# Altium PCB PCB_if-remote-control.pcbdoc
Units mil, origin at the board's own origin, x right, y up, seen from the top; angles counter-clockwise.
Board outline 10229.68 x 7944.68 mil, 2 copper layers (Top Layer, Bottom Layer); 88 components, 109 nets, 317 pads, 10 vias.
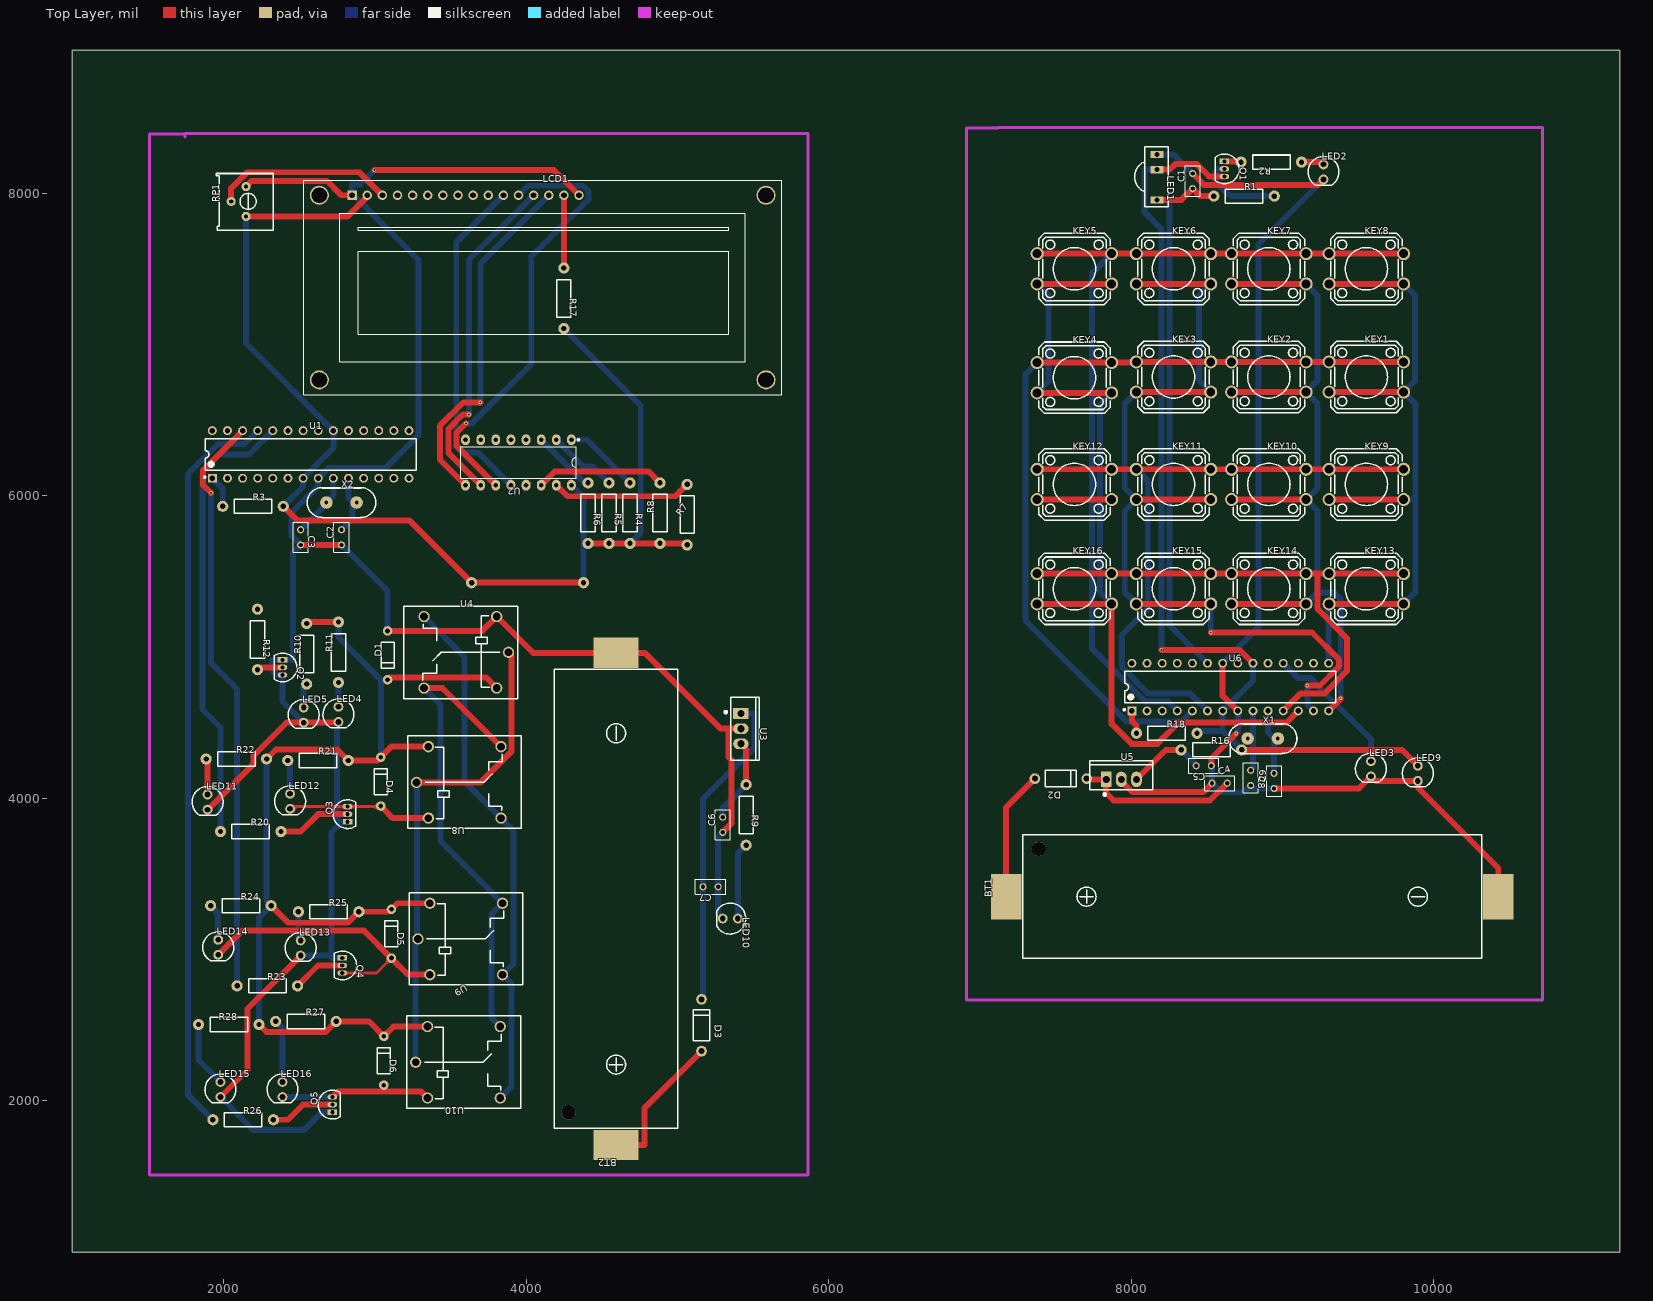
[diagram p0: Top Layer view]
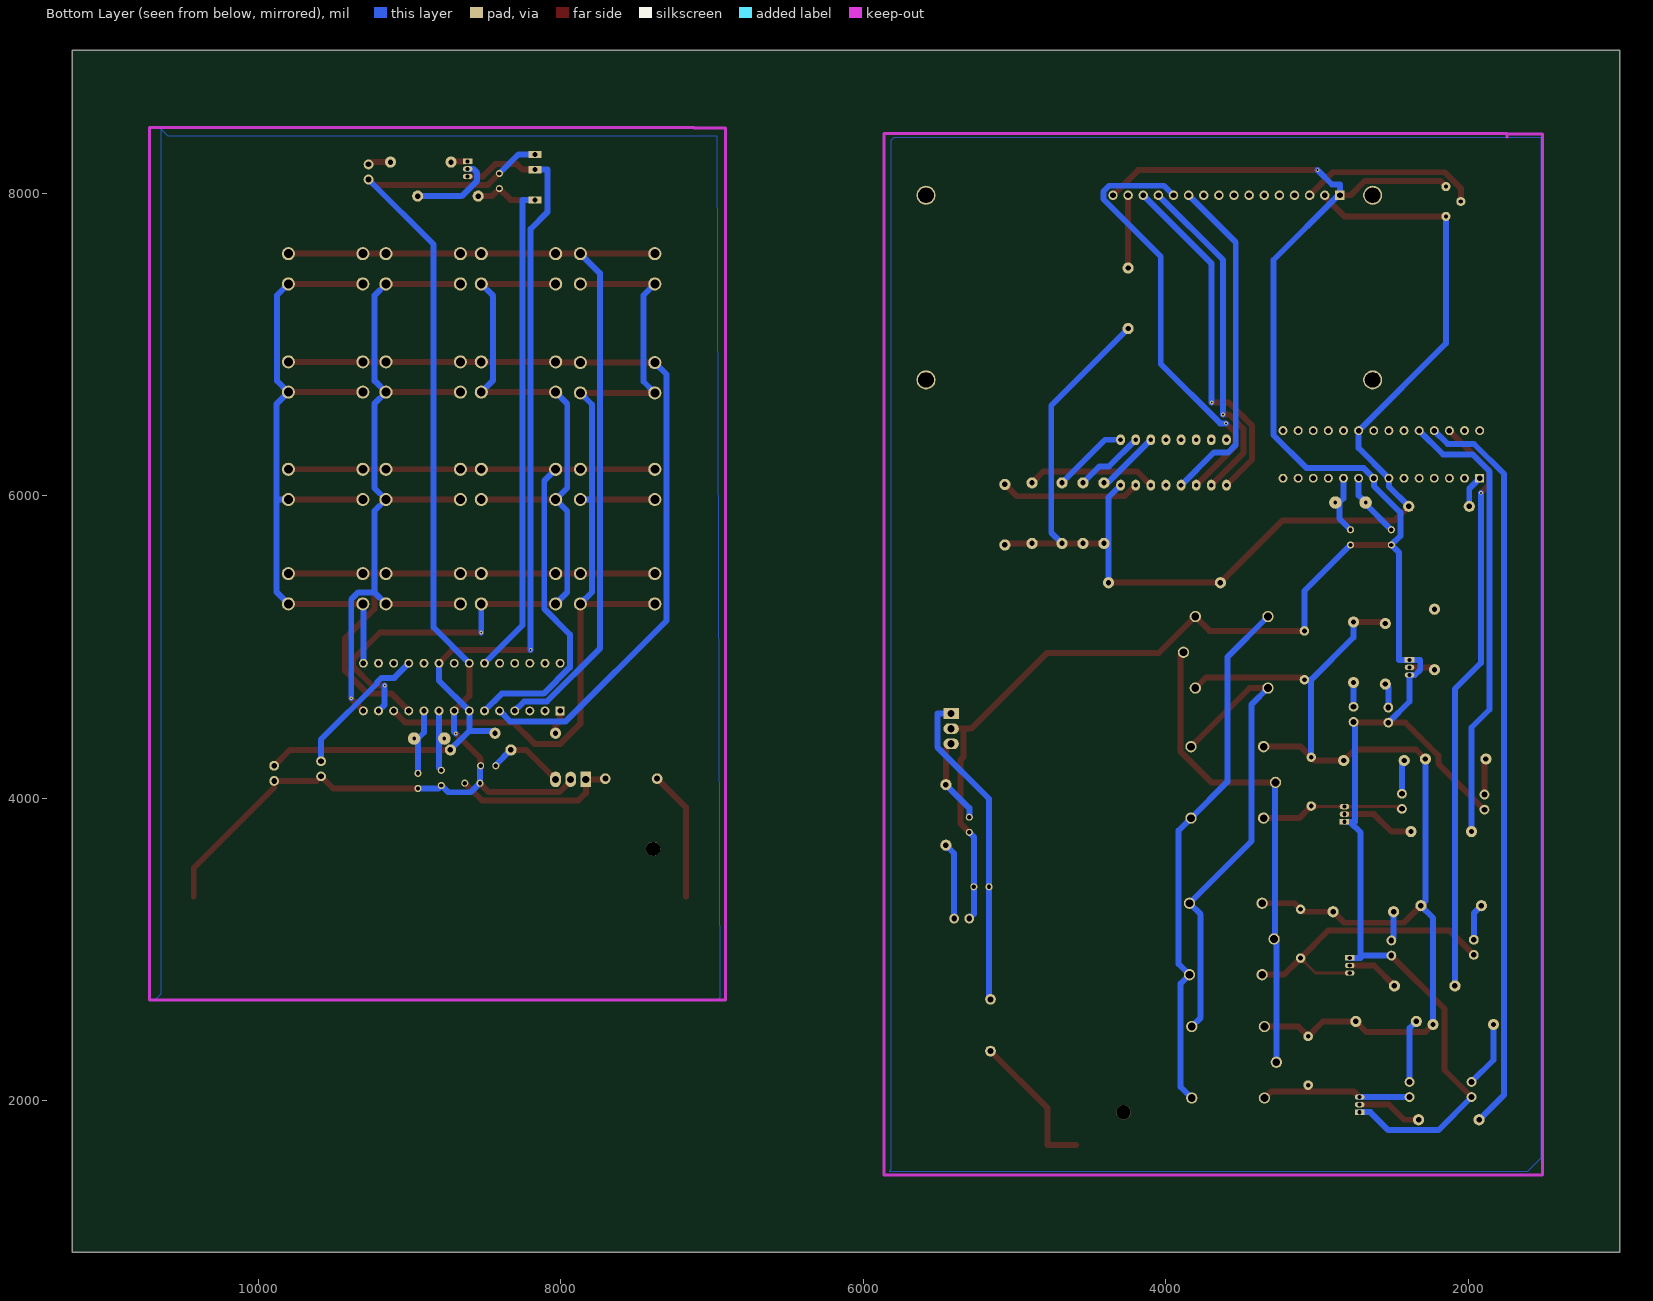
[diagram p1: Bottom Layer view, seen from below]

## Layer stack, top to bottom
Top Solder: solder mask 0.4, Solder Resist, Dk 3.5
Top Layer: signal copper 1.4
Dielectric1: dielectric 12.6, FR-4, Dk 4.8
Bottom Layer: signal copper 1.4
Bottom Solder: solder mask 0.4, Solder Resist, Dk 3.5

## Board outline
11229.68,1000 1000,1000 1000,8944.68 11229.68,8944.68

## Design rules (kind name [scope] priority, off if disabled: settings)
Clearance [All] p1: gap=10 ignorepadtopadclearanceinfootprint=FALSE except(0: Arc-Hole Track-Hole SMDPad-Hole THPad-Hole Via-Hole Fill-Hole Poly-Hole Region-Hole Text-Hole)
PolygonConnect [All] p1: connectstyle=Relief reliefconductorwidth=10 reliefentries=4 polygonreliefangle="90 Angle" airgapwidth=10
RoutingVias [All] p1: holewidth=28 width=50 viastyle="Through Hole" minholewidth=28 minwidth=50 maxholewidth=28 maxwidth=50
SolderMaskExpansion [All] p1: expansion=4 istentingtop=FALSE
Width [All] p1: maxlimit=10 minlimit=10 preferedwidth=10
30 further rules are at their usual default settings.

## Components (designator, comment, footprint, x,y, rotation, side; value= is the part's Value field where it differs from the comment)
BT1 "BH-18650-B1BA002" BATTERY-SMD_18650-1S-L77.1-W20.7-1 8799.84,3349.84 r90 top
BT2 "BH-18650-B1BA002" BATTERY-SMD_18650-1S-L77.1-W20.7-1 4594.84,3334.84 r180 top
C1 "1u" RAD-0.1 8406.21,8080.21 r90 top
C2 "1u" RAD-0.1 2779.84,5724.84 r90 top
C3 "1u" RAD-0.1 2509.84,5724.84 r270 top
C4 "1u" RAD-0.1 8584.84,4099.84 r0 top
C5 "1u" RAD-0.1 8479.84,4214.84 r180 top
C6 "1u" RAD-0.1 5299.84,3824.84 r90 top
C7 "1u" RAD-0.1 5219.84,3414.84 r180 top
C8 "1u" RAD-0.1 8789.84,4134.84 r270 top
C9 "1u" RAD-0.1 8944.84,4114.84 r90 top
D1 "1N4148" DO-35_BD2.0-L4.2-P8.20-D0.5-RD 3084.84,4944.84 r90 top
D2 "1N4007" DO-41_BD2.4-L4.7-P8.70-D0.9-RD 7534.84,4129.84 r180 top
D3 "1N4007" DO-41_BD2.4-L4.7-P8.70-D0.9-RD 5159.84,2499.84 r270 top
D4 "1N4148" DO-35_BD2.0-L4.2-P8.20-D0.5-RD 3039.84,4109.84 r270 top
D5 "1N4148" DO-35_BD2.0-L4.2-P8.20-D0.5-RD 3109.84,3104.84 r270 top
D6 "1N4148" DO-35_BD2.0-L4.2-P8.20-D0.5-RD 3059.84,2264.84 r270 top
KEY1 "K4-12×12_TH" KEY-TH_4P-L12.0-W12.0-P5.00-LS12.5 9554.84,6784.84 r0 top
KEY2 "K4-12×12_TH" KEY-TH_4P-L12.0-W12.0-P5.00-LS12.5 8909.84,6784.84 r0 top
KEY3 "K4-12×12_TH" KEY-TH_4P-L12.0-W12.0-P5.00-LS12.5 8279.84,6784.84 r0 top
KEY4 "K4-12×12_TH" KEY-TH_4P-L12.0-W12.0-P5.00-LS12.5 7624.84,6779.84 r0 top
KEY5 "K4-12×12_TH" KEY-TH_4P-L12.0-W12.0-P5.00-LS12.5 7624.84,7499.84 r0 top
KEY6 "K4-12×12_TH" KEY-TH_4P-L12.0-W12.0-P5.00-LS12.5 8279.85,7499.84 r0 top
KEY7 "K4-12×12_TH" KEY-TH_4P-L12.0-W12.0-P5.00-LS12.5 8909.84,7499.84 r0 top
KEY8 "K4-12×12_TH" KEY-TH_4P-L12.0-W12.0-P5.00-LS12.5 9554.84,7499.84 r0 top
KEY9 "K4-12×12_TH" KEY-TH_4P-L12.0-W12.0-P5.00-LS12.5 9554.84,6074.84 r0 top
KEY10 "K4-12×12_TH" KEY-TH_4P-L12.0-W12.0-P5.00-LS12.5 8909.84,6074.84 r0 top
KEY11 "K4-12×12_TH" KEY-TH_4P-L12.0-W12.0-P5.00-LS12.5 8279.85,6074.84 r0 top
KEY12 "K4-12×12_TH" KEY-TH_4P-L12.0-W12.0-P5.00-LS12.5 7624.84,6074.84 r0 top
KEY13 "K4-12×12_TH" KEY-TH_4P-L12.0-W12.0-P5.00-LS12.5 9554.84,5384.84 r0 top
KEY14 "K4-12×12_TH" KEY-TH_4P-L12.0-W12.0-P5.00-LS12.5 8909.84,5384.84 r0 top
KEY15 "K4-12×12_TH" KEY-TH_4P-L12.0-W12.0-P5.00-LS12.5 8279.85,5384.84 r0 top
KEY16 "K4-12×12_TH" KEY-TH_4P-L12.0-W12.0-P5.00-LS12.5 7624.84,5384.84 r0 top
LCD1 "LCD1602" LCD1602 4109.84,7375.74 r0 top
LED1 "TSOP1736" SENSOR-TH_TSOP17XX 8171.21,8105.21 r270 top
LED2 "LED-TH-5mm_G" LED-TH_BD5.0_GREEN 9271.21,8140.21 r0 top
LED3 "ir26-21c" LED-TH_BD5.0_GREEN 9584.84,4194.84 r0 top
LED4 "LED-TH-5mm_G" LED-TH_BD5.0_GREEN 2759.84,4554.84 r0 top
LED5 "LED-TH-5mm_G" LED-TH_BD5.0_GREEN 2529.84,4549.84 r0 top
LED9 "LED-TH-5mm_G" LED-TH_BD5.0_GREEN 9894.84,4164.84 r0 top
LED10 "LED-TH-5mm_G" LED-TH_BD5.0_GREEN 5349.84,3204.84 r270 top
LED11 "LED-TH-5mm_G" LED-TH_BD5.0_GREEN 1894.84,3974.84 r0 top
LED12 "LED-TH-5mm_G" LED-TH_BD5.0_GREEN 2439.84,3979.84 r0 top
LED13 "LED-TH-5mm_G" LED-TH_BD5.0_GREEN 2509.84,3009.84 r0 top
LED14 "LED-TH-5mm_G" LED-TH_BD5.0_GREEN 1964.84,3014.84 r0 top
LED15 "LED-TH-5mm_G" LED-TH_BD5.0_GREEN 1979.84,2074.84 r0 top
LED16 "LED-TH-5mm_G" LED-TH_BD5.0_GREEN 2389.84,2074.84 r0 top
Q1 "2N3906(TO-92)" TO-92-3_L4.9-W3.7-P1.27-L 8616.21,8160.21 r270 top
Q2 "2N3904(TO-92)" ? 2389.84,4864.84 r270 top
Q3 "2N3904(TO-92)" ? 2819.84,3894.84 r90 top
Q4 "2N3904(TO-92)" ? 2784.84,2894.84 r270 top
Q5 "2N3904(TO-92)" ? 2719.84,1974.84 r90 top
R1 "1k" R_AXIAL-0.4 8746.21,7980.21 r0 top
R2 "1k" R_AXIAL-0.4 8926.21,8205.21 r180 top
R3 "10k" R_AXIAL-0.4 2194.84,5929.84 r0 top
R4 "10k" R_AXIAL-0.4 4687.34,5884.84 r270 top
R5 "10k" R_AXIAL-0.4 4548.59,5884.84 r270 top
R6 "10k" R_AXIAL-0.4 4409.84,5884.84 r270 top
R7 "10k" R_AXIAL-0.4 5064.84,5874.84 r90 top
R8 "10k" R_AXIAL-0.4 4884.84,5884.84 r90 top
R9 "1k" R_AXIAL-0.4 5454.84,3889.84 r270 top
R10 "1k" R_AXIAL-0.4 2549.84,4954.84 r90 top
R11 "1k" R_AXIAL-0.4 2759.84,4964.84 r90 top
R12 "1k" R_AXIAL-0.4 2224.84,5049.84 r270 top
R16 "1k" R_AXIAL-0.4 8529.84,4319.84 r0 top
R17 "470" R_AXIAL-0.4 4249.84,7304.84 r270 top
R18 "10k" R_AXIAL-0.4 8234.84,4429.84 r0 top
R20 "1k" R_AXIAL-0.4 2179.84,3779.84 r0 top
R21 "1k" R_AXIAL-0.4 2624.84,4249.84 r0 top
R22 "1k" R_AXIAL-0.4 2084.84,4259.84 r0 top
R23 "1k" R_AXIAL-0.4 2289.84,2759.84 r0 top
R24 "1k" R_AXIAL-0.4 2114.84,3289.84 r0 top
R25 "1k" R_AXIAL-0.4 2694.84,3249.84 r0 top
R26 "1k" R_AXIAL-0.4 2129.84,1874.84 r0 top
R27 "1k" R_AXIAL-0.4 2544.84,2524.84 r0 top
R28 "1k" R_AXIAL-0.4 2034.84,2504.84 r0 top
RP1 "R_3386P_EU" RES-ADJ-TH_3386P 2099.84,7944.84 r90 top
U1 "ATMEGA328P-PU" DIP-28_L34.6-W7.3-P2.54-LS10.2-BL 2576.04,6272.84 r0 top
U2 "PCF8574P" DIP-16_L19.3-W6.4-P2.54-LS7.6-BL 3949.84,6219.84 r180 top
U3 "7805(TO-220)" TO-220-3_L10.0-W4.5-P2.54-L 5419.84,4459.84 r270 top
U4 "RELAY-SPST" RELAY-TH_RELAY-SPST 3604.84,4964.84 r0 top
U5 "7805(TO-220)" TO-220-3_L10.0-W4.5-P2.54-L 7934.84,4124.84 r0 top
U6 "ATMEGA328P-PU" DIP-28_L34.6-W7.3-P2.54-LS10.2-BL 8654.84,4734.84 r0 top
U8 "RELAY-SPST" RELAY-TH_RELAY-SPST 3554.84,4104.84 r180 top
U9 "RELAY-SPST" RELAY-TH_RELAY-SPST 3564.84,3069.84 r180 top
U10 "RELAY-SPST" RELAY-TH_RELAY-SPST 3549.84,2254.84 r180 top
X1 "4MHz" CRISTAL_4MHZ 8869.84,4394.84 r0 top
X2 "4MHz" CRISTAL_4MHZ 2779.84,5954.84 r0 top

## Footprints (in the part's own frame and the unit in brackets; to place one, negate y for a bottom-side part, rotate by r counter-clockwise, add the part's x,y. Pads: shape width x height; smd on the part's side, far side on the other; paste and mask are expansions set on the pad)
BATTERY-SMD_18650-1S-L77.1-W20.7-1 [mm]
  rect 7.62x5.08 smd paste+0 mask+0.051: 1(0,-41.313) 2(0,41.313)
  round 2.4 hole 2.4 unplated paste+0: ""(8,35.84)
  silkscreen extent -10.35,-38.54 10.35,38.54
CRISTAL_4MHZ [mm]
  round 2.1 hole 0.6 paste+0 mask+0.051: 1(-2.54,0) 2(2.54,0)
  silkscreen extent -5.75,-2.56 5.75,2.56
DIP-16_L19.3-W6.4-P2.54-LS7.6-BL [mm]
  oval 1.46x1.825 hole 0.8 paste+0 mask+0.051: 1(-8.89,-3.81) 2(-6.35,-3.81) 3(-3.81,-3.81) 4(-1.27,-3.81) 5(1.27,-3.81) 6(3.81,-3.81) 7(6.35,-3.81) 8(8.89,-3.81) 9(8.89,3.81) 10(6.35,3.81) 11(3.81,3.81) 12(1.27,3.81) 13(-1.27,3.81) 14(-3.81,3.81) 15(-6.35,3.81) 16(-8.89,3.81)
  silkscreen extent -10.22,-3.96 9.73,2.67
DIP-28_L34.6-W7.3-P2.54-LS10.2-BL [mm]
  rect 1.5x1.5 hole 0.9 paste+0 mask+0.051: 1(-16.51,-4)
  round 1.5 hole 0.9 paste+0 mask+0.051: 2(-13.97,-4) 3(-11.43,-4) 4(-8.89,-4) 5(-6.35,-4) 6(-3.81,-4) 7(-1.27,-4) 8(1.27,-4) 9(3.81,-4) 10(6.35,-4) 11(8.89,-4) 12(11.43,-4) 13(13.97,-4) 14(16.51,-4) 15(16.51,4) 16(13.97,4) 17(11.43,4) 18(8.89,4) 19(6.35,4) 20(3.81,4) 21(1.27,4) 22(-1.27,4) 23(-3.81,4) 24(-6.35,4) 25(-8.89,4) 26(-11.43,4) 27(-13.97,4) 28(-16.51,4)
  silkscreen extent -17.94,-3.95 17.7,2.65
DO-35_BD2.0-L4.2-P8.20-D0.5-RD [mm]
  round 1.6 hole 0.8 paste+0 mask+0.051: 1(-4.1,0) 2(4.1,0)
  silkscreen extent -2.2,-1.1 2.2,1.1
DO-41_BD2.4-L4.7-P8.70-D0.9-RD [mm]
  round 1.8 hole 1 paste+0 mask+0.051: 1(-4.35,0) 2(4.35,0)
  silkscreen extent -2.6,-1.4 2.6,1.4
KEY-TH_4P-L12.0-W12.0-P5.00-LS12.5 [mm]
  round 2.2 hole 1.5 paste+0 mask+0.051: 1(-6.251,2.54) 2(6.251,2.54) 3(-6.251,-2.54) 4(6.251,-2.54)
  silkscreen extent -5.99,-6 5.99,6
LCD1602 [mm]
  round 3.2 hole 2.5 slot 2.625 at 0 deg paste+0 mask+0.051: 0(-37.5,-15.5) 0(-37.5,15.5) 0(37.5,-15.5) 0(37.5,15.5)
  rect 1.6x1.6 hole 1 paste+0 mask+0.051: 1(-32,15.5)
  round 1.6 hole 1 paste+0 mask+0.051: 2(-29.46,15.5) 3(-26.92,15.5) 4(-24.38,15.5) 5(-21.84,15.5) 6(-19.3,15.5) 7(-16.76,15.5) 8(-14.22,15.5) 9(-11.68,15.5) 10(-9.14,15.5) 11(-6.6,15.5) 12(-4.06,15.5) 13(-1.52,15.5) 14(1.02,15.5) 15(3.56,15.5) 16(6.1,15.5)
  silkscreen extent -40.13,-18.03 40.13,18.03
LED-TH_BD5.0_GREEN [mil]
  round 65 hole 38 paste+0 mask+2: 1(0,50) 2(0,-50)
  silkscreen extent -102,-88 102,102
R_AXIAL-0.4 [mil]
  round 74 hole 35.4 paste+0 mask+2: 1(-200,0) 2(200,0)
  silkscreen extent -124,-47 124,47
RAD-0.1 [mil]
  round 47 hole 28 paste+0 mask+2: 1(-50,0) 2(50,0)
  silkscreen extent -100,-50 100,50
RELAY-TH_RELAY-SPST [mm]
  round 1.9 hole 1.3 paste+0 mask+0.05: 1(-7.1,6) 2(5.1,6) 3(7.1,0) 4(5.1,-6) 5(-7.1,-6)
  silkscreen extent -10.5,-7.8 8.6,7.7
RES-ADJ-TH_3386P [mil]
  round 60 hole 27.56 paste+0 mask+2: 1(98.43,-49.21) 2(0.01,49.22) 3(-98.43,-49.21)
  silkscreen extent -190,-228 185,147
SENSOR-TH_TSOP17XX [mil]
  rect 47.7x85.9 hole 32 paste+0 mask+2: GND(-150,0) OUT(150,0) V+(-50,0)
  silkscreen extent -200,-149 194,75
TO-92-3_L4.9-W3.7-P1.27-L [mm]
  rect 0.9x1.6 hole 0.7 paste+0 mask+0.051: 1(-1.27,0)
  oval 0.9x1.6 hole 0.7 paste+0 mask+0.051: 2(0,0) 3(1.27,0)
  silkscreen extent -2.48,-1.5 2.48,2.48
TO-220-3_L10.0-W4.5-P2.54-L [mm]
  rect 1.8x2.6 hole 1.2 paste+0 mask+0.051: 1(-2.54,0.005)
  oval 1.8x2.6 hole 1.2 paste+0 mask+0.051: 2(0,0.005) 3(2.54,-0.005)
  silkscreen extent -5.3,-2.73 5.3,3.09
? [mm]
  rect 0.9x1.6 hole 0.7 paste+0 mask+0.051: 1(-1.27,0)
  oval 0.9x1.6 hole 0.7 paste+0 mask+0.051: 2(0,0) 3(1.27,0)
  silkscreen extent -2.41,-1.35 2.41,2.41

## Free pads (board coordinates)
  round 74 hole 35.4 paste+0 mask+2: 1(4379.84,5424.84) 2(3639.84,5424.84)

## Via types
v1: diameter 24.02, hole 12.01, Top Layer to Bottom Layer, 10 vias

## Nets (pads, with @x,y where several pads share a name; then routed paths per layer and width w, separated by ;. In a path a pad name is that pad's centre, name@x,y a point inside that pad or via, vN(x,y) a via of type N, cw(c..) or ccw(c..) an arc to the next point about the centre after c; other vN are vias at no path point)
5V: LED10.1 R9.2 | length 507.8
  Bottom Layer w39.37: LED10.1 5399.84,3634.84 R9.2
+5V: LCD1.2 pad.1 pad.2 R3.2 R4.2 R5.2 R6.2 R7.1 R8.1 R17.2 RP1.3 U1.7 U1.20 U2.16 | length 8378.6
  Top Layer w39.37: RP1.3 2820.32,7846.41 2950,7976.09 LCD1.2 ; R3.2 2487.9,5836.78 3227.9,5836.78 pad.2 pad.1 ; R6.2 R5.2 R4.2 R8.1 5054.84,5684.84 R7.1
  Bottom Layer w39.37: RP1.3 2149.05,7007.31 U1.20 2726.04,6315.36 U1.7 2526.04,6061.04 R3.2 ; R17.2 4758.06,6596.62 4758.06,5755.56 R4.2 ; U2.16 4379.84,5989.84 R6.2@4379.84,5684.84 ; pad.1 R6.2@4379.84,5684.84 ; R6.2 R6.2@4379.84,5684.84
++5V: LED1.V+ LED9.1 Q1.3 R16.2 R18.2 U6.7 U6.20 | length 6530.1
  Top Layer w39.37: LED1.V+ 8253.54,8155.21 8290.17,8191.84 8433.47,8191.84 8515.1,8110.21 Q1.3 ; v1(8199.71,4980.93) 8716.23,4980.93 U6.20 ; R16.2 9789.84,4319.84 LED9.1
  Bottom Layer w39.37: LED1.V+ 8088.89,8155.21 8088.89,7874.08 8199.71,7763.26 v1(8199.71,4980.93) ; R18.2 8449.84,4444.84 8604.84,4444.84 ; R16.2 8604.84,4444.84 ; U6.20 8804.84,4777.36 U6.7 8604.84,4444.84
COM: U4.3 U8.3 U9.3 U10.3 | length 3239
  Top Layer w39.37: U8.3 3699.51,4104.84 3904.44,4309.77 3904.44,4944.77 U4.3
  Bottom Layer w39.37: U10.3 3270.31,3062.34 U9.3@3277.81,3069.84 ; U8.3 3277.81,4102.34 U9.3@3277.81,3069.84 ; U9.3 U9.3@3277.81,3069.84
D2_2: BT1.2 D2.2 | length 858.8
  Top Layer w39.37: BT1.2 7173.34,3939.6 D2.2
D3_2: BT2.2 D3.2 | length 965.2
  Top Layer w39.37: BT2.2 4784.24,1708.34 4784.24,1952.98 D3.2
DB4: LCD1.11 U2.12 | length 2250.7
  Bottom Layer w39.37: LCD1.11 3538.42,7674.39 3538.42,6336.01 3588.48,6285.95 3683.73,6285.95 U2.12
DB5: LCD1.12 U2.11 | length 2939.3
  Top Layer w39.37: v1(3602.74,6477.86) 3539.53,6414.65 3539.53,6330.15 U2.11
  Bottom Layer w39.37: v1(3602.74,6477.86) 3641.89,6477.86 4034.3,6870.27 4034.3,7581.08 4413.06,7959.84 4413.06,8012.1 4376.13,8049.03 4013.06,8049.03 LCD1.12
DB6: LCD1.13 U2.10 | length 2260.4
  Top Layer w39.37: v1(3623.12,6536.37) 3582.51,6536.37 3488.06,6441.92 3488.06,6281.62 U2.10
  Bottom Layer w39.37: v1(3623.12,6536.37) 3623.12,7559.09 LCD1.13
DB7: LCD1.14 U2.9 | length 2350.1
  Top Layer w39.37: U2.9 3430.27,6239.41 3430.27,6461.33 3585.47,6616.53 v1(3697.55,6616.53)
  Bottom Layer w39.37: v1(3697.55,6616.53) 3697.55,7533.52 LCD1.14
GND: BT2.1 C2.1 C3.2 C6.1 C7.1 D1.2 LCD1.1 LCD1.16 LED4.2 LED5.2 LED10.2 LED11.2 LED13.2 LED15.2 Q2.1 Q2.3 Q3.1 Q4.1 Q5.1 RP1.1 U1.8 U3.2 U4.2 | length 17061.1
  Top Layer w39.37: LED11.2 2199.05,4229.05 2199.05,4282.45 2416.44,4499.84 LED5.2 2754.84,4499.84 LED4.2 ; LED15.2 2158.41,2203.41 2158.41,2608.41 LED13.2 ; RP1.1 2186.7,8080.91 2684.16,8080.91 2779.1,7985.97 LCD1.1 ; C3.2 C2.1 ; v1(2997.47,8152.29) 4183.68,8152.29 LCD1.16 ; D1.2 3710.83,5106.26 U4.2 4045.35,4961.34 BT2.1 4688.73,4961.34 4784.24,4961.34 5285.73,4459.85 5336.83,4459.85 ; C6.1 5358.96,3833.96 5358.96,4252.3 5336.83,4274.43 5336.83,4459.85 ; U3.2@5420.04,4459.85 5336.83,4459.85
  Bottom Layer w39.37: LED15.2 2198.66,1806.02 2530.12,1806.02 2648.94,1924.84 Q5.1 ; LED13.2 2713.94,2959.84 ; LED5.2 2389.84,4639.84 Q2.3 2353.78,4814.84 2318.94,4849.68 2318.94,4914.84 Q2.1 2460.74,4914.84 2460.74,5625.74 C3.2 2449.81,5734.87 2449.81,5887.83 2626.04,6064.06 U1.8 2692.45,6181.77 3069.84,6181.77 3288.75,6400.68 3288.75,7558.04 2850,7996.79 LCD1.1@2850,8009.5 ; LED4.2 2748.94,4493.94 2748.94,3844.84 2784.39,3844.84 ; C2.1 3084.84,5369.84 D1.2 ; Q4.1 2713.94,2944.84 2713.94,2959.84 ; Q3.1 2784.39,3844.84 ; LCD1.1 LCD1.1@2850,8009.5 ; v1(2997.47,8152.29) 2902.05,8056.87 2850,8056.87 LCD1.1@2850,8009.5 ; LED10.2 5269.84,3234.84 C7.1 5269.84,3744.84 C6.1 ; 2713.94,2959.84 2713.94,3774.39 2784.39,3844.84
GND1: BT1.1 C1.2 C4.1 C5.1 C8.2 C9.1 LED1.GND LED2.2 LED3.2 LED9.2 U5.2 U6.8 U6.22 | length 8688.6
  Top Layer w39.37: U5.2 7934.84,4113.96 8008.54,4040.26 8475.26,4040.26 C4.1 ; C1.2 8481.1,8055.32 9236.32,8055.32 LED2.2 ; C5.1 8529.84,4263.23 v1(8694.39,4427.78) ; U6.22 8604.84,4677.36 U6.8 ; C9.1 9504.84,4064.84 LED3.2 9614.84,4114.84 LED9.2 9894.84,4070.74 10426.34,3539.24 BT1.1
  Bottom Layer w39.37: LED1.GND 8281.21,8255.21 C1.2 ; C5.1 8534.84,4209.84 C4.1 8595.1,4039.58 8744.58,4039.58 C8.2 8809.84,4064.84 C9.1 ; U6.22 8841.12,5128.6 8841.12,7660.12 LED2.2 ; v1(8694.39,4427.78) 8704.84,4438.23 U6.8
INPUT: R12.1
LCD1_3: LCD1.3 RP1.2 | length 1193.8
  Top Layer w39.37: RP1.2 2050.63,8032.37 2156.51,8138.25 2897.72,8138.25 LCD1.3
LCD1_7: LCD1.7
LCD1_8: LCD1.8
LCD1_9: LCD1.9
LCD1_10: LCD1.10
LED11_1: LED11.1 R22.1 | length 239.1
  Top Layer w39.37: R22.1 1894.84,4249.84 LED11.1
LED12_1: LED12.1 R21.1 | length 226.2
  Bottom Layer w39.37: R21.1 2439.84,4234.84 LED12.1
LED13_1: LED13.1 R25.1 | length 196.2
  Bottom Layer w39.37: R25.1 2494.84,3074.84 LED13.1
LED14_1: LED14.1 R24.1 | length 245.7
  Bottom Layer w39.37: R24.1 1964.84,3239.84 LED14.1
LED15_1: LED15.1 R28.1 | length 440.1
  Bottom Layer w39.37: R28.1 1834.84,2269.84 LED15.1
LED16_1: LED16.1 R27.1 | length 418.6
  Bottom Layer w39.37: R27.1 2389.84,2479.84 LED16.1
NC: U4.5 U8.5 U9.5 U10.5 | length 3177
  Top Layer w39.37: U4.5 3446.81,4728.62 U8.5
  Bottom Layer w39.37: U4.5 3433.09,4620.84 3433.09,3717.34 U9.5 3770.63,3232.32 3770.63,2549.8 U10.5
NO: U4.1 U8.1 U9.1 U10.1 | length 3511.6
  Bottom Layer w39.37: U4.1 3594.21,4932.16 3594.21,4108.78 U8.1 3916.6,3786.39 3916.6,2905.85 U9.1 3902.43,2775.56 3902.43,2091.68 U10.1
P0: LCD1.6
P1: LCD1.5
P2: LCD1.4
PB0: KEY2.3 KEY2.4 KEY7.3 KEY7.4 KEY10.3 KEY10.4 KEY14.3 KEY14.4 U6.14 | length 5215
  Top Layer w39.37: KEY14.3 KEY14.4 ; KEY10.3 KEY10.4 ; KEY2.3 KEY2.4 ; KEY7.3 KEY7.4 ; U6.14 9385.22,4657.74 v1(9385.22,4661.12)
  Bottom Layer w39.37: KEY14.4 9232.34,5361.24 ; KEY7.4 9230.82,7324.96 9230.82,6759.72 KEY2.4 9232.34,6608.44 9232.34,6051.24 KEY10.4 9232.34,5898.44 9232.34,5361.24 ; v1(9385.22,4661.12) 9385.22,5314.39 9338.37,5361.24 9232.34,5361.24
PB1: KEY1.3 KEY1.4 KEY8.3 KEY8.4 KEY9.3 KEY9.4 KEY13.3 KEY13.4 U6.15 | length 4681.4
  Top Layer w39.37: KEY13.3 KEY13.4 ; KEY9.3 KEY9.4 ; KEY1.3 KEY1.4 ; KEY8.3 KEY8.4
  Bottom Layer w39.37: U6.15 9304.84,5280.94 KEY13.3 ; KEY13.4 9878.29,5362.19 9878.29,5974.84 ; KEY9.4 9878.29,5974.84 ; KEY8.4 9875.82,7324.96 9875.82,6759.72 KEY1.4 9878.29,6607.49 9878.29,5974.84
PB4: LED3.1 U6.18 | length 937.3
  Bottom Layer w39.37: U6.18 9100.77,4796.39 9185.42,4796.39 9215.43,4766.38 9215.43,4758.42 9584.84,4389.01 LED3.1
PC0: C1.1 LED1.OUT R1.1 U6.23 | length 3676.1
  Top Layer w39.37: LED1.OUT 8331.21,7955.21 C1.1 8456.21,7980.21 R1.1
  Bottom Layer w39.37: LED1.OUT 8253.54,7955.21 8253.54,5143.62 U6.23
PC1: R20.1 U1.24 | length 3006.5
  Bottom Layer w39.37: R20.1 1979.84,4467.88 1861.14,4586.58 1861.14,6160.51 1973.47,6272.84 2168.56,6272.84 U1.24
PC2: R26.1 U1.25 | length 4917
  Bottom Layer w39.37: R26.1 1764.68,2040 1764.68,6143.14 1963.65,6342.11 2137.83,6342.11 U1.25
PC3: R23.1 U1.26 | length 3871.8
  Top Layer w39.37: v1(1917.3,6018.58) 1864.94,6070.94 1864.94,6169.22 U1.26
  Bottom Layer w39.37: v1(1917.3,6018.58) 1917.3,4895.07 2089.84,4722.53 R23.1
PC4: R7.2 U2.15 | length 928
  Top Layer w39.37: U2.15 4273.41,5996.27 4986.27,5996.27 R7.2
PC5: R8.2 U2.14 | length 853.1
  Top Layer w39.37: U2.14 4189.53,6159.53 4810.15,6159.53 R8.2
PD2: KEY5.1 KEY5.2 KEY6.1 KEY6.2 KEY7.1 KEY7.2 KEY8.1 KEY8.2 U6.4 | length 5819.4
  Top Layer w39.37: KEY5.1 KEY5.2 KEY6.1 KEY6.2 KEY7.1 KEY7.2 KEY8.1 KEY8.2
  Bottom Layer w39.37: KEY5.2 7742.14,7471.04 7742.14,4989.42 8092.07,4639.49 8242.71,4639.49 U6.4
PD3: KEY1.1 KEY1.2 KEY2.1 KEY2.2 KEY3.1 KEY3.2 KEY4.1 KEY4.2 U6.5 | length 5569.7
  Top Layer w39.37: KEY4.1 KEY4.2 8028.74,6879.84 KEY3.1 KEY3.2 KEY2.1 KEY2.2 KEY1.1 KEY1.2
  Bottom Layer w39.37: KEY4.1 7301.42,6802.52 7301.42,5174.41 7967.56,4508.27 8335.75,4508.27 U6.5
PD4: KEY9.1 KEY9.2 KEY10.1 KEY10.2 KEY11.1 KEY11.2 KEY12.1 KEY12.2 U6.6 | length 4517.9
  Top Layer w39.37: KEY12.1 KEY12.2 KEY11.1 KEY11.2 KEY10.1 KEY10.2 KEY9.1 KEY9.2
  Bottom Layer w39.37: KEY11.1 8109.64,6098.94 8109.64,5252.54 7939.77,5082.67 7939.77,4865.28 8113.27,4691.78 8390.42,4691.78 U6.6
PD5: KEY13.1 KEY13.2 KEY14.1 KEY14.2 KEY15.1 KEY15.2 KEY16.1 KEY16.2 U6.11 | length 3676.5
  Top Layer w39.37: KEY16.1 KEY16.2 KEY15.1 KEY15.2 KEY14.1 KEY14.2 9232.34,5484.84 ; U6.11 9121.37,4693.89 9278.59,4693.89 9426.07,4841.37 9426.07,5057.8 9232.34,5251.53 9232.34,5484.84 ; KEY13.2 KEY13.1 9232.34,5484.84
PD6: KEY4.3 KEY4.4 KEY5.3 KEY5.4 KEY12.3 KEY12.4 KEY16.3 KEY16.4 U6.12 | length 6459.2
  Top Layer w39.37: KEY16.3 KEY16.4 7870.94,4491.76 8003.18,4359.52 8173.41,4359.52 8316.01,4502.12 9029.6,4502.12 U6.12 ; KEY12.3 KEY12.4 ; KEY4.3 KEY4.4 ; KEY5.3 KEY5.4
  Bottom Layer w39.37: KEY4.3 7453.62,6754.72 7453.62,7324.96 KEY5.3 ; KEY16.4 7793.6,5362.18 7793.6,5974.84 ; KEY12.4 7793.6,5974.84 ; KEY4.4 7793.6,6602.5 7793.6,5974.84
PD7: KEY3.3 KEY3.4 KEY6.3 KEY6.4 KEY11.3 KEY11.4 KEY15.3 KEY15.4 U6.13 | length 5878
  Top Layer w39.37: KEY15.3 KEY15.4 ; KEY11.3 KEY11.4 ; KEY3.3 KEY3.4 ; KEY6.3 KEY6.4 ; v1(8525.94,5095.92) 9195.38,5095.92 9373.12,4918.18 9373.12,4870.29 9247.97,4745.14 v1(9164.18,4745.14)
  Bottom Layer w39.37: KEY15.3 7957.43,5361.15 7957.43,5898.53 KEY11.3 7957.43,6051.15 7957.43,6608.53 KEY3.3 ; v1(8525.94,5095.92) KEY15.4 ; KEY3.4 8447.74,6763.04 8447.74,7321.64 KEY6.4 ; v1(9164.18,4745.14) 9164.18,4618.02 U6.13
Q1_1: Q1.1 R2.2 | length 112.1
  Top Layer w39.37: Q1.1 8721.21,8210.21 R2.2
Q1_2: Q1.2 R1.2 | length 560.8
  Bottom Layer w39.37: Q1.2 8579.38,8160.21 8553.08,8133.91 8553.08,8082.75 8655.62,7980.21 R1.2
Q3_2: Q3.2 R20.2 | length 487.6
  Top Layer w39.37: R20.2 2510.37,3779.84 2625.37,3894.84 Q3.2
Q4_2: Q4.2 R23.2 | length 350.9
  Top Layer w39.37: R23.2 2624.84,2894.84 Q4.2
Q5_2: Q5.2 R26.2 | length 431.4
  Top Layer w39.37: R26.2 2425.85,1874.84 2525.85,1974.84 Q5.2
R2_1: LED2.1 R2.1 | length 151.2
  Top Layer w39.37: R2.1 9256.21,8205.21 LED2.1
R3_1: R3.1 U1.1 | length 214
  Bottom Layer w39.37: U1.1 1994.84,6046.56 R3.1
R4_1: R4.1 U2.1 | length 505.6
  Bottom Layer w39.37: U2.1 4402.34,6369.84 R4.1
R5_1: R5.1 U2.2 | length 466.8
  Bottom Layer w39.37: U2.2 4376.8,6192.88 4440.55,6192.88 R5.1
R6_1: R6.1 U2.3 | length 428.1
  Bottom Layer w39.37: U2.3 4384.84,6084.84 R6.1
R10_1: LED5.1 R10.1 | length 163.3
  Bottom Layer w39.37: LED5.1 2529.84,4734.84 R10.1
R11_1: LED4.1 R11.1 | length 160
  Bottom Layer w39.37: LED4.1 R11.1
R12_2: Q2.2 R12.2 | length 171.2
  Top Layer w39.37: R12.2 2239.84,4864.84 Q2.2
R17_1: LCD1.15 R17.1 | length 481.2
  Top Layer w39.37: R17.1 4250,7505 LCD1.15
R18_1: R18.1 U6.1 | length 159.9
  Top Layer w39.37: U6.1 8004.84,4508.43 8034.84,4478.43 R18.1
S$36178: 
S$36188: 
U1_2: U1.2
U1_3: U1.3
U1_4: U1.4
U1_5: U1.5
U1_6: U1.6
U1_11: U1.11
U1_12: U1.12
U1_13: U1.13
U1_14: U1.14
U1_15: U1.15
U1_16: U1.16
U1_17: U1.17
U1_18: U1.18
U1_19: U1.19
U1_21: U1.21
U1_22: U1.22
U1_23: U1.23
U1_27: U1.27
U1_28: U1.28
U2_4: U2.4
U2_5: U2.5
U2_6: U2.6
U2_7: U2.7
U2_8: U2.8
U2_13: U2.13
U3_1: C7.2 D3.1 U3.1 | length 2124.6
  Bottom Layer w39.37: D3.1 5169.84,2681.1 C7.2 5169.84,3996.62 5510.62,4337.4 5510.62,4559.85 U3.1@5420.04,4559.85
U3_3: C6.2 R9.1 U3.3 | length 563.8
  Top Layer w39.37: U3.3@5419.65,4359.84 5454.84,4324.65 R9.1
  Bottom Layer w39.37: C6.2 5299.84,3934.84 R9.1
U5_1: C4.2 D2.1 U5.1 | length 1088.3
  Top Layer w39.37: D2.1 7710.9,4125.04 U5.1 7834.84,4034.45 7883.04,3986.25 8521.25,3986.25 C4.2
U5_3: C5.2 R16.1 U5.3 | length 522.3
  Top Layer w39.37: U5.3@8034.85,4124.64 8230.05,4319.84 R16.1
  Bottom Layer w39.37: R16.1 8429.84,4219.84 C5.2
U6_2: U6.2
U6_3: U6.3
U6_16: U6.16
U6_17: U6.17
U6_19: U6.19
U6_21: U6.21
U6_24: U6.24
U6_25: U6.25
U6_26: U6.26
U6_27: U6.27
U6_28: U6.28
U8_2: D4.2 LED12.2 Q3.3 U8.2 | length 955
  Top Layer w19.68: LED12.2 2454.84,3944.84 Q3.3 3036.24,3944.84 D4.2
  Top Layer w39.37: D4.2 3053.81,3934.45 3119.64,3868.62 U8.2
U9_2: D5.2 LED14.2 Q4.3 U9.2 | length 1952
  Top Layer w19.68: Q4.3 3011.24,2844.84 D5.2
  Top Layer w39.37: LED14.2 2124.86,3124.86 2928.4,3124.86 D5.2 3219.64,2833.62 U9.2
U10_2: D6.2 LED16.2 Q5.3 U10.2 | length 1034.2
  Top Layer w39.37: Q5.3@2719.84,2024.85 2756.01,2061.02 3059.84,2061.02 ; D6.2 3059.84,2061.02 ; U10.2 3306.65,2061.02 3059.84,2061.02
  Bottom Layer w39.37: LED16.2 Q5.3
VCC: D1.1 D4.1 D5.1 D6.1 R10.2 R11.2 R21.2 R22.2 R24.2 R25.2 R27.2 R28.2 U4.4 U8.4 U9.4 U10.4 | length 7368.8
  Top Layer w39.37: R28.2 2284.75,2454.93 2674.93,2454.93 R27.2 2961.26,2524.84 D6.1 3124.64,2491.06 U10.4 ; R22.2 2346.96,4321.96 2752.72,4321.96 R21.2 3018.42,4249.84 D4.1 3109.64,4341.06 U8.4 ; R24.2 2427.61,3177.07 2822.07,3177.07 R25.2 3093.42,3249.84 D5.1 3149.64,3306.06 U9.4 ; R10.2 2559.84,5164.84 R11.2 ; D1.1 3099.97,4798.55 3735.7,4798.55 U4.4
  Bottom Layer w39.37: R28.2 2234.84,3209.84 R24.2 2284.84,3319.84 R22.2 ; R11.2 2759.84,5063.42 3039.84,4783.42 ; D4.1 3039.84,4783.42 ; D1.1 3039.84,4783.42
X1_1: C8.1 U6.9 X1.1 | length 432.8
  Bottom Layer w39.37: X1.1 X1.1@8803.91,4394.84 ; C8.1 8803.91,4198.91 X1.1@8803.91,4394.84 ; U6.9 8804.84,4395.77 X1.1@8803.91,4394.84
X1_2: C9.2 U6.10 X1.2 | length 454.1
  Bottom Layer w39.37: U6.10 8904.84,4434.84 X1.2@8944.84,4394.84 ; C9.2 X1.2@8944.84,4394.84 ; X1.2 X1.2@8944.84,4394.84
X2_1: C3.1 U1.9 X2.1 | length 430.1
  Bottom Layer w39.37: C3.1 2679.84,5944.84 X2.1 2726.04,6001.04 U1.9
X2_2: C2.2 U1.10 X2.2 | length 408.8
  Bottom Layer w39.37: C2.2 2852.94,5847.94 X2.2@2852.94,5954.84 ; U1.10 2826.04,5981.74 X2.2@2852.94,5954.84 ; X2.2 X2.2@2852.94,5954.84
pads on no net: BT1. BT2. LCD1.0

## Polygon pours and split planes (outlines as drawn)
GND1 on Bottom Layer "Bottom Layer-GND1" (solid, pour order 0): 6964.84,8374.84 10594.84,8374.84 10644.84,8424.84 10644.84,2704.84 10684.84,2664.84 6964.84,2664.84 6944.84,2684.84
GND on Bottom Layer "Bottom Layer-GND" (solid, pour order 1): 1519.84,8364.84 5799.84,8364.84 5819.84,8344.84 5819.84,1544.84 5829.84,1534.84 1609.84,1534.84 1519.84,1624.84

## Other copper
Top Layer:
  region net U9_2: 3078.41,2945.39 3111.81,2911.99 3086.48,2906.14 3072.56,2920.06
  region net U9_2: 2798.62,2827.13 2798.62,2862.56 2828.15,2854.68 2828.15,2835
  region net U8_2: 2806.06,3927.13 2806.06,3962.56 2776.54,3954.68 2776.54,3935
  region net U8_2: 2468.33,3914.2 2451.8,3960.06 2477.92,3954.68 2485.02,3935
  region net U8_2: 3021.05,3923.14 3017.11,3970.22 2996.29,3954.68 2997.94,3935
  region net U8_2: 2833.62,3927.13 2833.62,3962.56 2863.15,3954.68 2863.15,3935